# EAGLE board prueba capacidad (EAGLE 7.1.0), part 1 of 2
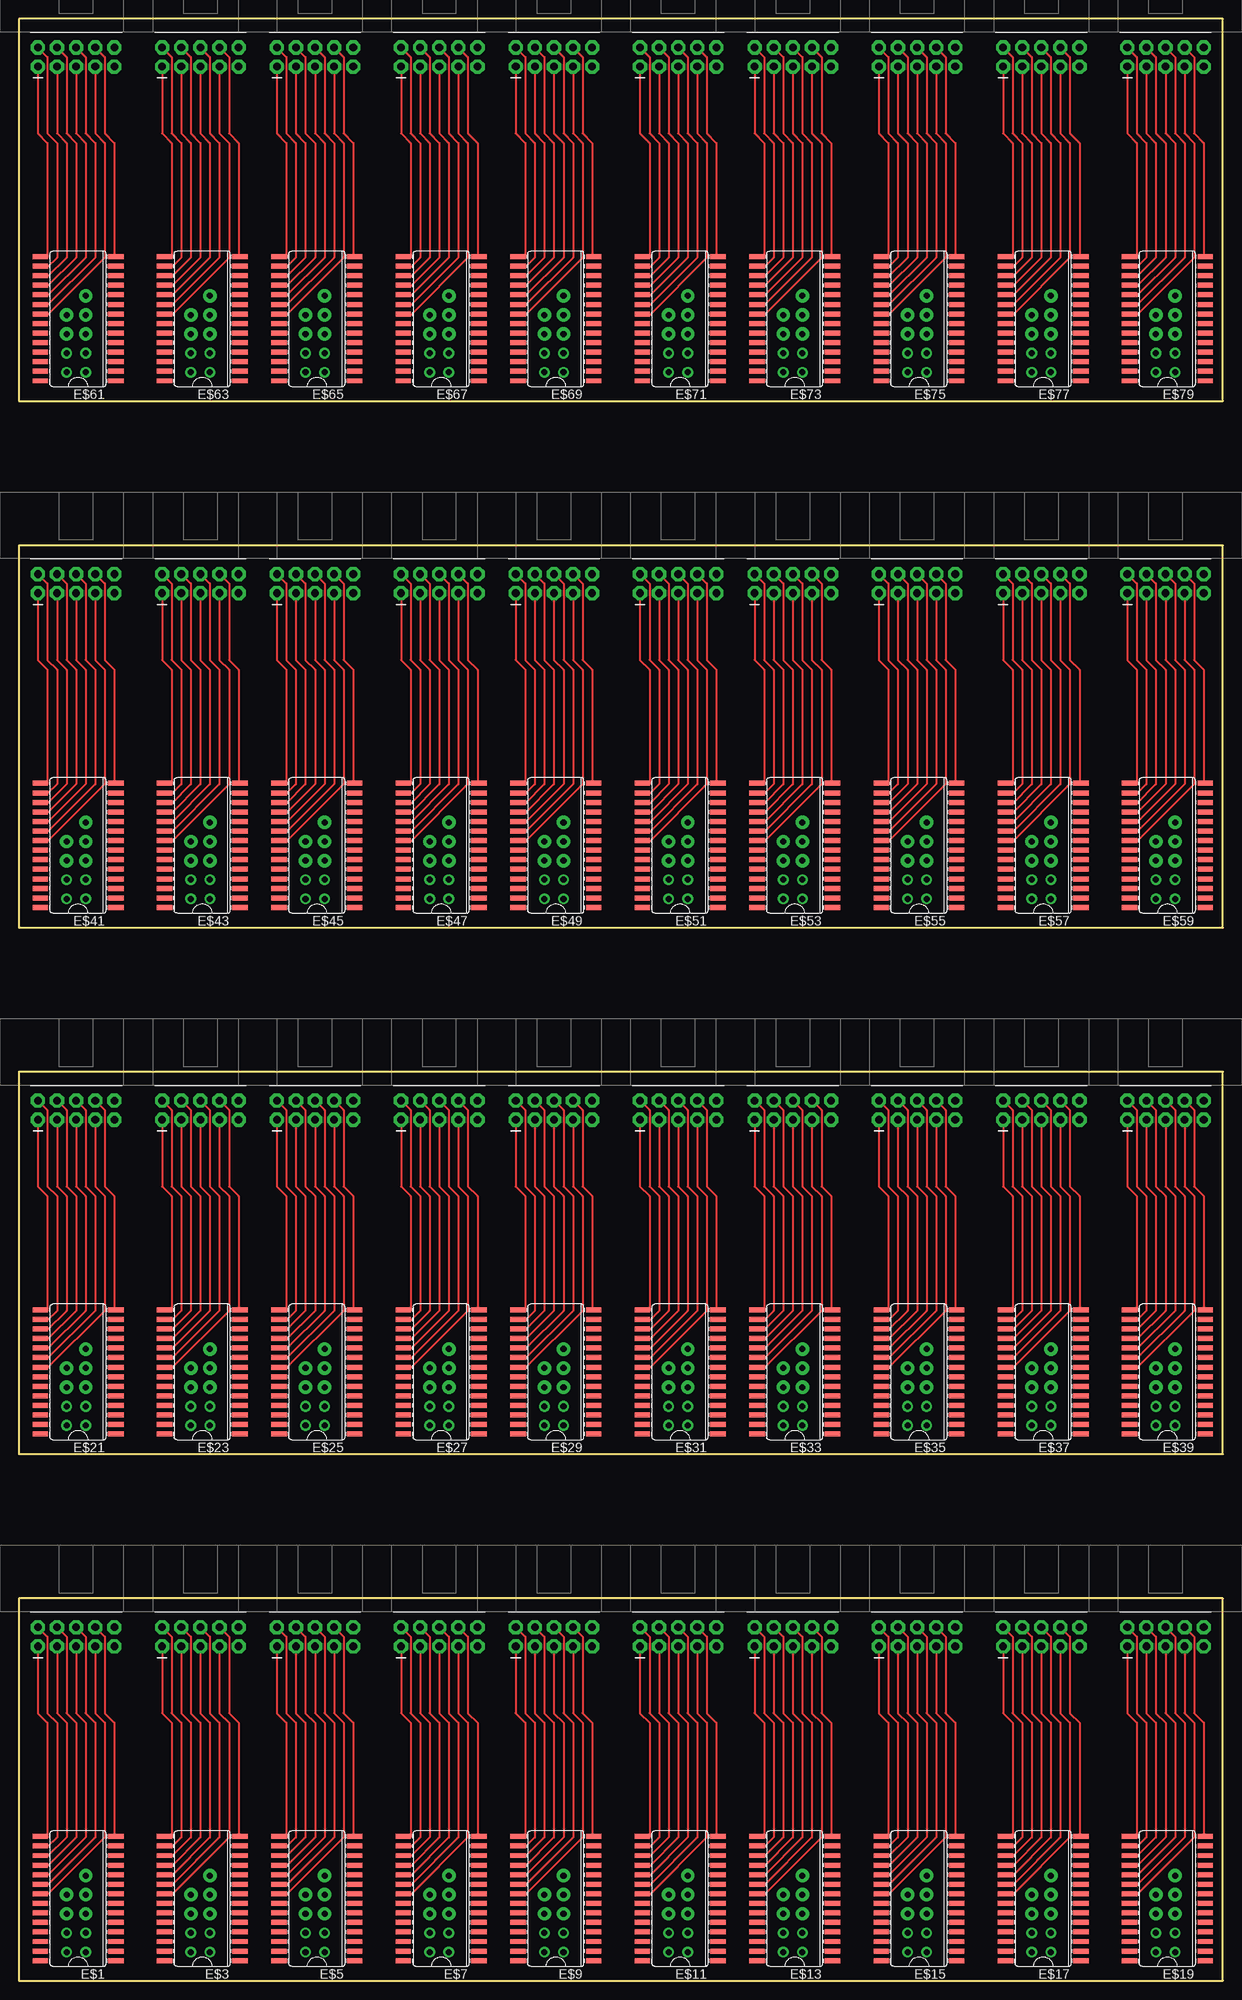
[diagram p0: board, top side]

Size 160.02 x 260.8 mm. Coordinates in mm from the lower left corner, seen from the top.
Outline: 0,0 160.02,0 160.02,50.8 0,50.8 0,0
Outline: 0,70 160.02,70 160.02,120.8 0,120.8 0,70
Outline: 0,140 160.02,140 160.02,190.8 0,190.8 0,140
Outline: 0,210 160.02,210 160.02,260.8 0,260.8 0,210
Copper layers (1*16): Top 0.035mm / dielectric 1.5mm / Bottom 0.035mm
Design rules "default": minimum track width 10mil, minimum drill 24mil, track to track 8mil, track to pad 8mil, pad to pad 8mil, via to via 8mil, smd to smd 8mil, copper to edge 40mil, drill to drill 8mil, minimum pad ring 10mil, minimum via ring 8mil, stop-mask expansion 4mil, vias tented up to drill 0mil, thermal gap 10mil

## Footprints (pad centres in the part's own frame; a part is rotated, then mirrored left to right if it is on the bottom)
SO28W = smd 0.66 x 2.032: 1 -8.255,-5.029; 2 -6.985,-5.029; 3 -5.715,-5.029; 4 -4.445,-5.029; 5 -3.175,-5.029; 6 -1.905,-5.029; 7 -0.635,-5.029; 8 0.635,-5.029; 9 1.905,-5.029; 10 3.175,-5.029; 11 4.445,-5.029; 12 5.715,-5.029; 13 6.985,-5.029; 14 8.255,-5.029; 15 8.255,5.029; 16 6.985,5.029; 17 5.715,5.029; 18 4.445,5.029; 19 3.175,5.029; 20 1.905,5.029; 21 0.635,5.029; 22 -0.635,5.029; 23 -1.905,5.029; 24 -3.175,5.029; 25 -4.445,5.029; 26 -5.715,5.029; 27 -6.985,5.029; 28 -8.255,5.029
IDCSN-10 = drill 1.016 pad 1.88 octagon: 1 -1.27,5.08; 2 1.27,5.08; 3 -1.27,2.54; 4 1.27,2.54; 5 -1.27,0; 6 1.27,0; 7 -1.27,-2.54; 8 1.27,-2.54; 9 -1.27,-5.08; 10 1.27,-5.08

## Placement (x,y rotation side)
E$1  [SO28W]  7.87,10.92 90 top
E$2  [IDCSN-10]  7.62,45.72 90 top
E$3  [SO28W]  24.38,10.92 90 top
E$4  [IDCSN-10]  24.13,45.72 90 top
E$5  [SO28W]  39.62,10.92 90 top
E$6  [IDCSN-10]  39.37,45.72 90 top
E$7  [SO28W]  56.13,10.92 90 top
E$8  [IDCSN-10]  55.88,45.72 90 top
E$9  [SO28W]  71.37,10.92 90 top
E$10  [IDCSN-10]  71.12,45.72 90 top
E$11  [SO28W]  87.88,10.92 90 top
E$12  [IDCSN-10]  87.63,45.72 90 top
E$13  [SO28W]  103.12,10.92 90 top
E$14  [IDCSN-10]  102.87,45.72 90 top
E$15  [SO28W]  119.63,10.92 90 top
E$16  [IDCSN-10]  119.38,45.72 90 top
E$17  [SO28W]  136.14,10.92 90 top
E$18  [IDCSN-10]  135.89,45.72 90 top
E$19  [SO28W]  152.65,10.92 90 top
E$20  [IDCSN-10]  152.4,45.72 90 top
E$21  [SO28W]  7.87,80.92 90 top
E$22  [IDCSN-10]  7.62,115.72 90 top
E$23  [SO28W]  24.38,80.92 90 top
E$24  [IDCSN-10]  24.13,115.72 90 top
E$25  [SO28W]  39.62,80.92 90 top
E$26  [IDCSN-10]  39.37,115.72 90 top
E$27  [SO28W]  56.13,80.92 90 top
E$28  [IDCSN-10]  55.88,115.72 90 top
E$29  [SO28W]  71.37,80.92 90 top
E$30  [IDCSN-10]  71.12,115.72 90 top
E$31  [SO28W]  87.88,80.92 90 top
E$32  [IDCSN-10]  87.63,115.72 90 top
E$33  [SO28W]  103.12,80.92 90 top
E$34  [IDCSN-10]  102.87,115.72 90 top
E$35  [SO28W]  119.63,80.92 90 top
E$36  [IDCSN-10]  119.38,115.72 90 top
E$37  [SO28W]  136.14,80.92 90 top
E$38  [IDCSN-10]  135.89,115.72 90 top
E$39  [SO28W]  152.65,80.92 90 top
E$40  [IDCSN-10]  152.4,115.72 90 top
E$41  [SO28W]  7.87,150.92 90 top
E$42  [IDCSN-10]  7.62,185.72 90 top
E$43  [SO28W]  24.38,150.92 90 top
E$44  [IDCSN-10]  24.13,185.72 90 top
E$45  [SO28W]  39.62,150.92 90 top
E$46  [IDCSN-10]  39.37,185.72 90 top
E$47  [SO28W]  56.13,150.92 90 top
E$48  [IDCSN-10]  55.88,185.72 90 top
E$49  [SO28W]  71.37,150.92 90 top
E$50  [IDCSN-10]  71.12,185.72 90 top
E$51  [SO28W]  87.88,150.92 90 top
E$52  [IDCSN-10]  87.63,185.72 90 top
E$53  [SO28W]  103.12,150.92 90 top
E$54  [IDCSN-10]  102.87,185.72 90 top
E$55  [SO28W]  119.63,150.92 90 top
E$56  [IDCSN-10]  119.38,185.72 90 top
E$57  [SO28W]  136.14,150.92 90 top
E$58  [IDCSN-10]  135.89,185.72 90 top
E$59  [SO28W]  152.65,150.92 90 top
E$60  [IDCSN-10]  152.4,185.72 90 top
E$61  [SO28W]  7.87,220.92 90 top
E$62  [IDCSN-10]  7.62,255.72 90 top
E$63  [SO28W]  24.38,220.92 90 top
E$64  [IDCSN-10]  24.13,255.72 90 top
E$65  [SO28W]  39.62,220.92 90 top
E$66  [IDCSN-10]  39.37,255.72 90 top
E$67  [SO28W]  56.13,220.92 90 top
E$68  [IDCSN-10]  55.88,255.72 90 top
E$69  [SO28W]  71.37,220.92 90 top
E$70  [IDCSN-10]  71.12,255.72 90 top
E$71  [SO28W]  87.88,220.92 90 top
E$72  [IDCSN-10]  87.63,255.72 90 top
E$73  [SO28W]  103.12,220.92 90 top
E$74  [IDCSN-10]  102.87,255.72 90 top
E$75  [SO28W]  119.63,220.92 90 top
E$76  [IDCSN-10]  119.38,255.72 90 top
E$77  [SO28W]  136.14,220.92 90 top
E$78  [IDCSN-10]  135.89,255.72 90 top
E$79  [SO28W]  152.65,220.92 90 top
E$80  [IDCSN-10]  152.4,255.72 90 top

## Library data of the parts
E$1-E$80 = iv17

## Nets
S$1: E$2.2
S$2: E$2.4
S$3: E$2.6
S$4: E$2.8
S$9: E$2.3
S$10: E$2.1
S$11: E$2.5
S$12: E$2.7
S$18: E$4.3
S$19: E$4.1
S$20: E$4.5
S$21: E$4.7
S$22: E$4.2
S$23: E$4.4
S$24: E$4.6
S$25: E$4.8
S$35: E$6.3
S$36: E$6.1
S$37: E$6.5
S$38: E$6.7
S$39: E$6.2
S$40: E$6.4
S$41: E$6.6
S$42: E$6.8
S$52: E$8.3
S$53: E$8.1
S$54: E$8.5
S$55: E$8.7
S$56: E$8.2
S$57: E$8.4
S$58: E$8.6
S$59: E$8.8
S$69: E$10.3
S$70: E$10.1
S$71: E$10.5
S$72: E$10.7
S$73: E$10.2
S$74: E$10.4
S$75: E$10.6
S$76: E$10.8
S$86: E$12.3
S$87: E$12.1
S$88: E$12.5
S$89: E$12.7
S$90: E$12.2
S$91: E$12.4
S$92: E$12.6
S$93: E$12.8
S$103: E$14.3
S$104: E$14.1
S$105: E$14.5
S$106: E$14.7
S$107: E$14.2
S$108: E$14.4
S$109: E$14.6
S$110: E$14.8
S$120: E$16.3
S$121: E$16.1
S$122: E$16.5
S$123: E$16.7
S$124: E$16.2
S$125: E$16.4
S$126: E$16.6
S$127: E$16.8
S$137: E$18.3
S$138: E$18.1
S$139: E$18.5
S$140: E$18.7
S$141: E$18.2
S$142: E$18.4
S$143: E$18.6
S$144: E$18.8
S$154: E$20.3
S$155: E$20.1
S$156: E$20.5
S$157: E$20.7
S$158: E$20.2
S$159: E$20.4
S$160: E$20.6
S$161: E$20.8
S$171: E$22.3
S$172: E$22.1
S$173: E$22.5
S$174: E$22.7
S$175: E$22.2
S$176: E$22.4
S$177: E$22.6
S$178: E$22.8
S$188: E$24.3
S$189: E$24.1
S$190: E$24.5
S$191: E$24.7
S$192: E$24.2
S$193: E$24.4
S$194: E$24.6
S$195: E$24.8
S$205: E$26.3
S$206: E$26.1
S$207: E$26.5
S$208: E$26.7
S$209: E$26.2
S$210: E$26.4
S$211: E$26.6
S$212: E$26.8
S$222: E$28.3
S$223: E$28.1
S$224: E$28.5
S$225: E$28.7
S$226: E$28.2
S$227: E$28.4
S$228: E$28.6
S$229: E$28.8
S$239: E$30.3
S$240: E$30.1
S$241: E$30.5
S$242: E$30.7
S$243: E$30.2
S$244: E$30.4
S$245: E$30.6
S$246: E$30.8
S$256: E$32.3
S$257: E$32.1
S$258: E$32.5
S$259: E$32.7
S$260: E$32.2
S$261: E$32.4
S$262: E$32.6
S$263: E$32.8
S$273: E$34.3
S$274: E$34.1
S$275: E$34.5
S$276: E$34.7
S$277: E$34.2
S$278: E$34.4
S$279: E$34.6
S$280: E$34.8
S$290: E$36.3
S$291: E$36.1
S$292: E$36.5
S$293: E$36.7
S$294: E$36.2
S$295: E$36.4
S$296: E$36.6
S$297: E$36.8
S$307: E$38.3
S$308: E$38.1
S$309: E$38.5
S$310: E$38.7
S$311: E$38.2
S$312: E$38.4
S$313: E$38.6
S$314: E$38.8
S$324: E$40.3
S$325: E$40.1
S$326: E$40.5
S$327: E$40.7
S$328: E$40.2
S$329: E$40.4
S$330: E$40.6
S$331: E$40.8
S$341: E$42.3
S$342: E$42.1
S$343: E$42.5
S$344: E$42.7
S$345: E$42.2
S$346: E$42.4
S$347: E$42.6
S$348: E$42.8
S$358: E$44.3
S$359: E$44.1
S$360: E$44.5
S$361: E$44.7
S$362: E$44.2
S$363: E$44.4
S$364: E$44.6
S$365: E$44.8
S$375: E$46.3
S$376: E$46.1
S$377: E$46.5
S$378: E$46.7
S$379: E$46.2
S$380: E$46.4
S$381: E$46.6
S$382: E$46.8
S$392: E$48.3
S$393: E$48.1
S$394: E$48.5
S$395: E$48.7
S$396: E$48.2
S$397: E$48.4
S$398: E$48.6
S$399: E$48.8
S$409: E$50.3
S$410: E$50.1
S$411: E$50.5
S$412: E$50.7
S$413: E$50.2
S$414: E$50.4
S$415: E$50.6
S$416: E$50.8
S$426: E$52.3
S$427: E$52.1
S$428: E$52.5
S$429: E$52.7
S$430: E$52.2
S$431: E$52.4
S$432: E$52.6
S$433: E$52.8
S$443: E$54.3
S$444: E$54.1
S$445: E$54.5
S$446: E$54.7
S$447: E$54.2
S$448: E$54.4
S$449: E$54.6
S$450: E$54.8
S$460: E$56.3
S$461: E$56.1
S$462: E$56.5
S$463: E$56.7
S$464: E$56.2
S$465: E$56.4
S$466: E$56.6
S$467: E$56.8
S$477: E$58.3
S$478: E$58.1
S$479: E$58.5
S$480: E$58.7
S$481: E$58.2
S$482: E$58.4
S$483: E$58.6
S$484: E$58.8
S$494: E$60.3
S$495: E$60.1
S$496: E$60.5
S$497: E$60.7
S$498: E$60.2
S$499: E$60.4
S$500: E$60.6
S$501: E$60.8
S$511: E$62.3
S$512: E$62.1
S$513: E$62.5
S$514: E$62.7
S$515: E$62.2
S$516: E$62.4
S$517: E$62.6
S$518: E$62.8
S$528: E$64.3
S$529: E$64.1
S$530: E$64.5
S$531: E$64.7
S$532: E$64.2
S$533: E$64.4
S$534: E$64.6
S$535: E$64.8
S$545: E$66.3
S$546: E$66.1
S$547: E$66.5
S$548: E$66.7
S$549: E$66.2
S$550: E$66.4
S$551: E$66.6
S$552: E$66.8
S$562: E$68.3
S$563: E$68.1
S$564: E$68.5
S$565: E$68.7
S$566: E$68.2
S$567: E$68.4
S$568: E$68.6
S$569: E$68.8
S$579: E$70.3
S$580: E$70.1
S$581: E$70.5
S$582: E$70.7
S$583: E$70.2
S$584: E$70.4
S$585: E$70.6
S$586: E$70.8
S$596: E$72.3
S$597: E$72.1
S$598: E$72.5
S$599: E$72.7
S$600: E$72.2
S$601: E$72.4
S$602: E$72.6
S$603: E$72.8
S$613: E$74.3
S$614: E$74.1
S$615: E$74.5
S$616: E$74.7
S$617: E$74.2
S$618: E$74.4
S$619: E$74.6
S$620: E$74.8
S$630: E$76.3
S$631: E$76.1
S$632: E$76.5
S$633: E$76.7
S$634: E$76.2
S$635: E$76.4
S$636: E$76.6
S$637: E$76.8
S$647: E$78.3
S$648: E$78.1
S$649: E$78.5
S$650: E$78.7
S$651: E$78.2
S$652: E$78.4
S$653: E$78.6
S$654: E$78.8
S$664: E$80.3
S$665: E$80.1
S$666: E$80.5
S$667: E$80.7
S$668: E$80.2
S$669: E$80.4
S$670: E$80.6
S$671: E$80.8